# Altium PCB OFFICIAL_PCB.PcbDoc (part 2 of 2)
Units mil, origin at the board's own origin, x right, y up, seen from the top; angles counter-clockwise.
Board outline 1720 x 1725 mil, 2 copper layers (Top Layer, Bottom Layer); 67 components, 51 nets, 260 pads, 158 vias.
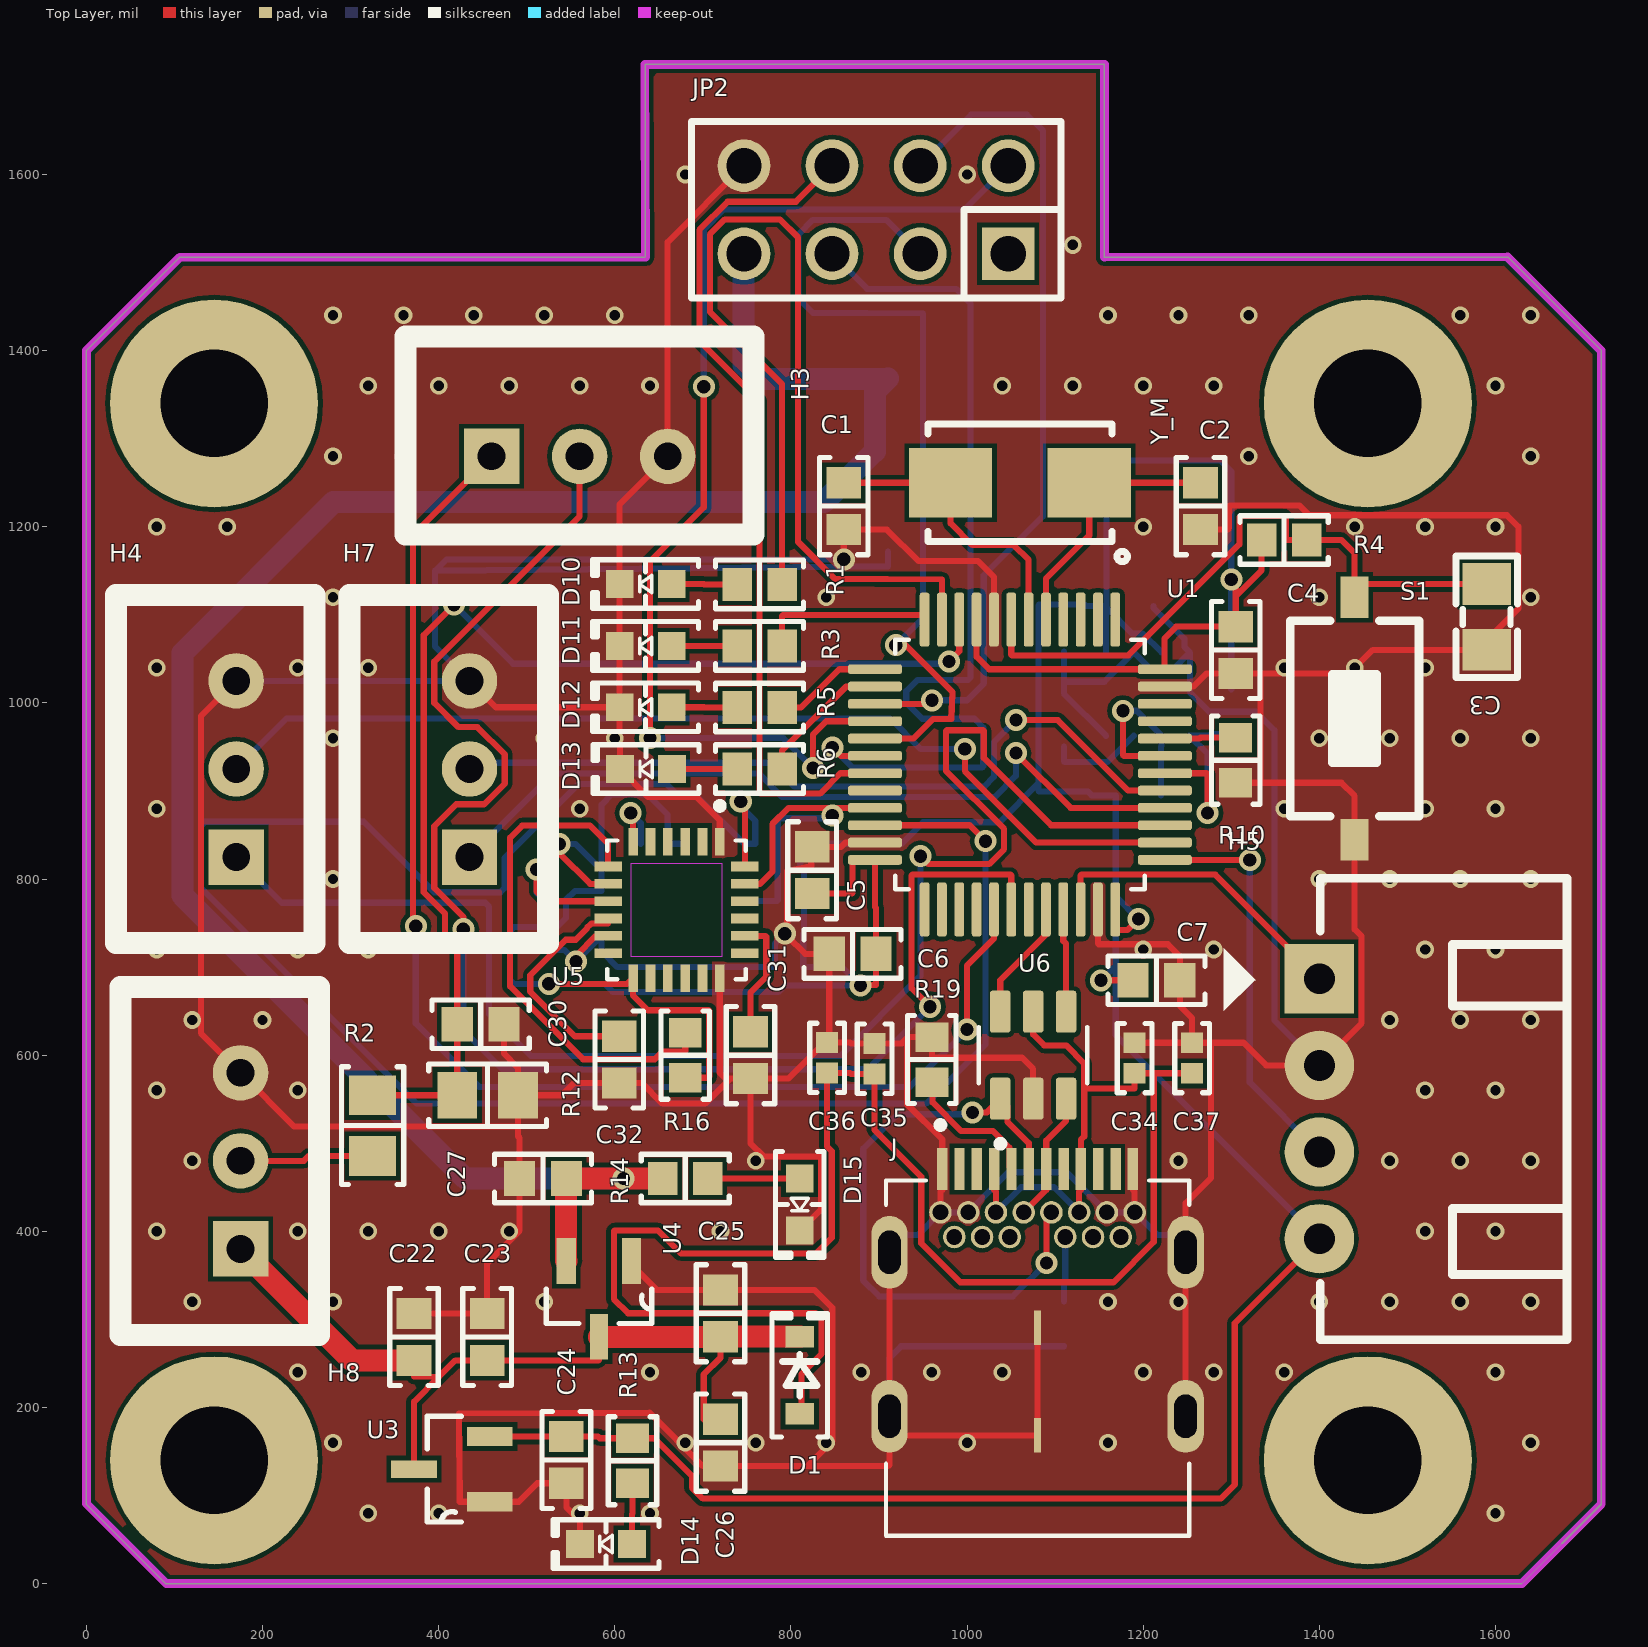
[diagram p0: Top Layer view]

## Via types
v1: diameter 20, hole 11.81, Top Layer to Bottom Layer, 122 vias
v2: diameter 25, hole 15, Top Layer to Bottom Layer, 36 vias

## Nets (pads, with @x,y where several pads share a name; then routed paths per layer and width w, separated by ;. In a path a pad name is that pad's centre, name@x,y a point inside that pad or via, vN(x,y) a via of type N, cw(c..) or ccw(c..) an arc to the next point about the centre after c; other vN are vias at no path point) (continued)
NetD15_1: (continued)
  Top Layer w7: R14.1 D15.1
NetJ_A6: J.A6 J.B6 U6.1 | length 713.2
  Top Layer w7: v2(1006,535) 1022.6,535 U6.1@1037.6,550 ; U6.1 U6.1@1037.6,550 ; J.A6 1070.16,500 1045.71,524.45 1045.71,541.89 U6.1@1037.6,550 ; v2(1090,364) 1090,415.75 J.B6
  Bottom Layer w7: v2(1006,535) 1004,533 921,533 882,494 882,344 900,326 1052,326 v2(1090,364)
NetJ_A7: J.A7 J.B7 U6.3 | length 149
  Top Layer w7: J.B7 1089.84,447.09 J.A7 1089.84,503 1112.4,525.56 U6.3
NetR15_1: R15.1 U2.2 | length 108.9
  Bottom Layer w7: R15.1 1110,933.5 1110.5,933 1159.5,933 U2.2
NetR16_1: R16.1 U5.7 | length 578.3
  Top Layer w7: U5.7 592.44,840.22 571.9,860.76 494.76,860.76 481,847 481,678.33 563.97,595.36 645.36,595.36 654,604 679,604 680,605 R16.1
NetR17_1: R17.1 U5.6 | length 73.3
  Top Layer w7: v2(618,875) 620.79,872.21 U5.6
  Bottom Layer w7: v2(618,875) 629.41,863.59 R17.1
NRST: C3.1 R4.1 S1.2 U1.7 | length 744.3
  Top Layer w7: U1.7 1050.16,1055 1051.16,1054 1183,1054 1309.18,1180.18 1309.18,1211 1310.38,1212.2 1359,1212.2 1362,1209.2 1362,1186 1363,1185 R4.1 1425,1185 1440,1170 S1.2@1440,1135 ; S1.2 S1.2@1440,1135 ; C3.1 S1.2@1440,1135
OSC_IN: C2.2 U1.5 Y_M.2 | length 302.1
  Top Layer w7: U1.5 1089.53,1141 1138.74,1190.21 Y_M.2 C2.2
OSC_OUT: C1.2 U1.6 Y_M.1 | length 341
  Top Layer w7: C1.2 Y_M.1 981.26,1204 1006,1179.26 1053.08,1179.26 1069.84,1162.5 U1.6
PIN_CHECK: C30.2 R2.1 R12.2 U1.10 | length 1326.4
  Top Layer w7: R2.1 R12.2 C30.2 421.1,720.2 407,734.3 407,761.02 383,785.01 383,864.99 383,1077 v2(417.5,1111.5) ; v2(979.5,1047) 991.1,1058.6 U1.10
  Bottom Layer w7: v2(417.5,1111.5) 484.5,1044.5 977,1044.5 v2(979.5,1047)
RF_CE: JP2.6 U1.19 | length 989.3
  Top Layer w7: JP2.6 805.68,1569 728.03,1569 696,1536.97 696,1411 764.41,1342.59 764.41,898 765.41,897 833,897 856.16,920.16 U1.19
RF_MISO: JP2.8 U1.16 | length 1292.5
  Top Layer w7: v2(640,960) 640,1161 701,1222 v2(701,1359) ; v2(825.16,926) 825.16,964.27 840.1,979.21 U1.16
  Bottom Layer w7: v2(640,960) 791.16,960 v2(825.16,926) ; v2(701,1359) 701,1537.5 723.92,1560.42 997.1,1560.42 JP2.8
RF_MOSI: JP2.2 U1.17 | length 984.2
  Top Layer w7: U1.17 939.14,959.53 961.36,981.75 982.09,981.75 983.34,1012.5 930.34,1065.5 v2(919,1065.5)
  Bottom Layer w7: v2(919,1065.5) 950,1096.5 950,1442 825,1443 808.25,1459.75 808.25,1531.68 825,1548.42 908.25,1548.42 JP2.2
RF_SCK: JP2.7 U1.15 | length 959.7
  Top Layer w7: U1.15 955.9,998.9 v2(960,1003)
  Bottom Layer w7: JP2.7 1004.68,1668 1068,1668 1086,1650 1086,1212 1019,1145 1019,1022 1000,1003 v2(960,1003)
RF_SS: JP2.3 U1.18 | length 1075.2
  Top Layer w7: v2(847,949.5) 856.66,939.84 U1.18
  Bottom Layer w7: JP2.3 886.68,1470 987.5,1470 1004,1453.5 1004,1029 1001,1026 943.5,1026 931,1013.5 931,1000 949,982 1008.5,982 1018.44,972.06 1018.44,928 1017,926.56 869.94,926.56 v2(847,949.5)
SWCLK: H5.3 U1.37 | length 460.9
  Top Layer w7: U1.37 v2(1321,821.73)
  Bottom Layer w7: v2(1321,821.73) 1321,569 H5.3
SWDIO: H5.1 U1.34 | length 359
  Top Layer w7: U1.34 1128.9,804 1129.9,805 1281.85,805 H5.1
USB_DM: U1.32 U6.6 | length 137.5
  Top Layer w7: U6.6 1037.6,685 1089.53,736.93 U1.32
USB_DP: U1.33 U6.4 | length 117.3
  Top Layer w7: U1.33 1109.21,729.79 1112.4,726.6 U6.4
V_6s_PIN: H8.2 R2.2 | length 152.3
  Top Layer w7: H8.2 247,480 252.55,485.55 R2.2
VCC: C4.2 C5.2 C6.2 C7.2 C18.2 C19.2 C20.2 C21.1 C24.2 H5.4 R4.2 R13.2 R15.2 R16.2 R17.2 R20.2 R21.2 R22.2 R23.2 U1.9 U1.24 U1.36 U1.48 U2.6 U2.8 U3.2 U5.8 U5.13 | length 5621.1
  Top Layer w7: U3.2 C24.2 581,167 582.97,165.03 R13.2 644.97,165.03 687.5,122.5 687.5,109 700,96.5 1288,96.5 1304,112.5 1304,295.57 H5.4 ; v2(525,681) 614.35,681 U5.13 620.79,667.71 637.5,651 706.2,651 707.2,650 707.2,575.61 706,574.41 R16.2 ; v2(537,839.76) 537,829.53 572,794.53 U5.8 ; C5.2 869,783.43 870,784.43 870,821.73 U1.24 895.43,768.14 896.57,767 C6.2 896.57,680 v2(879,679) ; U1.9 1010.79,1052.48 1025,1038.27 U1.48@1224,1038.27 ; v2(1152,685) C7.2 ; U1.36 1168.27,742 1182,742 v2(1194.5,754.5) ; U1.48 U1.48@1224,1038.27 ; v2(1300,1140) 1305,1135 1305,1121 ; R4.2 1334.41,1150.41 1305,1121 ; U1.48@1224,1038.27 1224,1073.07 1237.5,1086.57 C4.2 1305,1121
  Bottom Layer w7: v2(525,681) v2@522.32,681 ; v2(537,839.76) 537.15,839.62 555.38,839.62 585,810 ; R17.2 660.63,840 659.63,873.31 636.94,896 596.64,896 585,884.36 585,810 ; v2(1152,685) 1168.82,701.82 ; U2.8 1157.76,1109.33 C18.2 ; v2(1194.5,754.5) 1168.82,780.18 ; U2.6 1199.29,1078.7 1187.76,1078.7 1158.43,1108.03 C18.2 ; R20.2 v2(1300,1140) 1300,1262.93 1287.5,1275.43 1171.35,1275.43 1158.43,1262.5 C18.2 ; H5.4 1168.82,622.76 1168.82,701.82 ; v2@522.32,681 485.1,681 481,685.1 481,741 485.36,745.36 534.22,745.36 544.52,755.65 544.52,776.28 554.81,786.57 C20.2 585,810 ; v2@522.32,681 588.44,681 597.63,671.81 786,671.81 793.19,679 v2(879,679) 858,700 814,700 814,737.44 815,738.44 R22.2 815,808.59 810.59,813 R23.2 925.59,840 950.09,864.5 1037,864.5 1081,908.5 ; 1081,908.5 1081,1110.57 1082,1111.57 C19.2 1133,1111.57 1134.57,1110 C18.2 ; 1081,908.5 1081,900.41 1082,899.41 R15.2 1137,899.41 1141.41,895 R21.2 1168.82,780.18 ; 1168.82,701.82 1168.82,780.18
VCCNRF: C27.2 C28.1 JP2.4 R14.2 U4.2 | length 2378.9
  Top Layer w25: U4.2 544.61,366.75 544.61,459.61 C27.2 C27.2@550.18,460 ; C27.2@550.22,460.03 v2(610,460) ; v2(610,460) R14.2@650.18,460.03 ; R14.2@650.21,460 R14.2
  Bottom Layer w25: v2(610,460) 430.29,460 207.25,683.03 109,781.28 109,1056.43 280.61,1228.03 837.61,1228.03 895.24,1285.67 895.24,1353.67 C28.1 ; JP2.4 746.28,1509.61 746.28,1383.86 762.11,1368.03 C28.1@909.61,1368.03
pads on no net: J.A2 J.A3 J.A8 J.A10 J.A11 J.B2 J.B3 J.B8 J.B10 J.B11 JP2.1 U1.1 U1.2 U1.3 U1.4 U1.20 U1.25 U1.26 U1.27 U1.28 U1.31 U1.45 U1.46 U5.2 U5.3 U5.4 U5.5 U5.14 U5.15 U5.16 U5.17 U5.19 U5.21 U5.22

## Polygon pours and split planes (outlines as drawn)
GND on Top Layer "GND_L01_P001" (solid, pour order 1): 91,0 1630,0 1720,90 1720,1400 1613.5,1506.5 1156,1506 1156,1725 634,1725 635,1506 106,1506 0,1400 0,91
GND on Bottom Layer "GND_L02_P000" (solid, pour order 0): 91,0 1630,0 1720,90 1720,1400 1613.5,1506.5 1156,1506 1156,1725 634,1725 635,1506 106,1506 0,1400 0,91

## Keep-outs
Keep-Out Layer:
  lines w10: 0,91 0,1400 106,1506 635,1506 634,1725 1156,1725 1156,1506 1613.5,1506.5 1720,1400 1720,90 1630,0 91,0 0,91